# Altium PCB Digital_Clock_PCB.PcbDoc
Units mil, origin at the board's own origin, x right, y up, seen from the top; angles counter-clockwise.
Board outline 4350.74 x 2185.38 mil, 2 copper layers (Top Layer, Bottom Layer); 31 components, 24 nets, 126 pads, 0 vias.
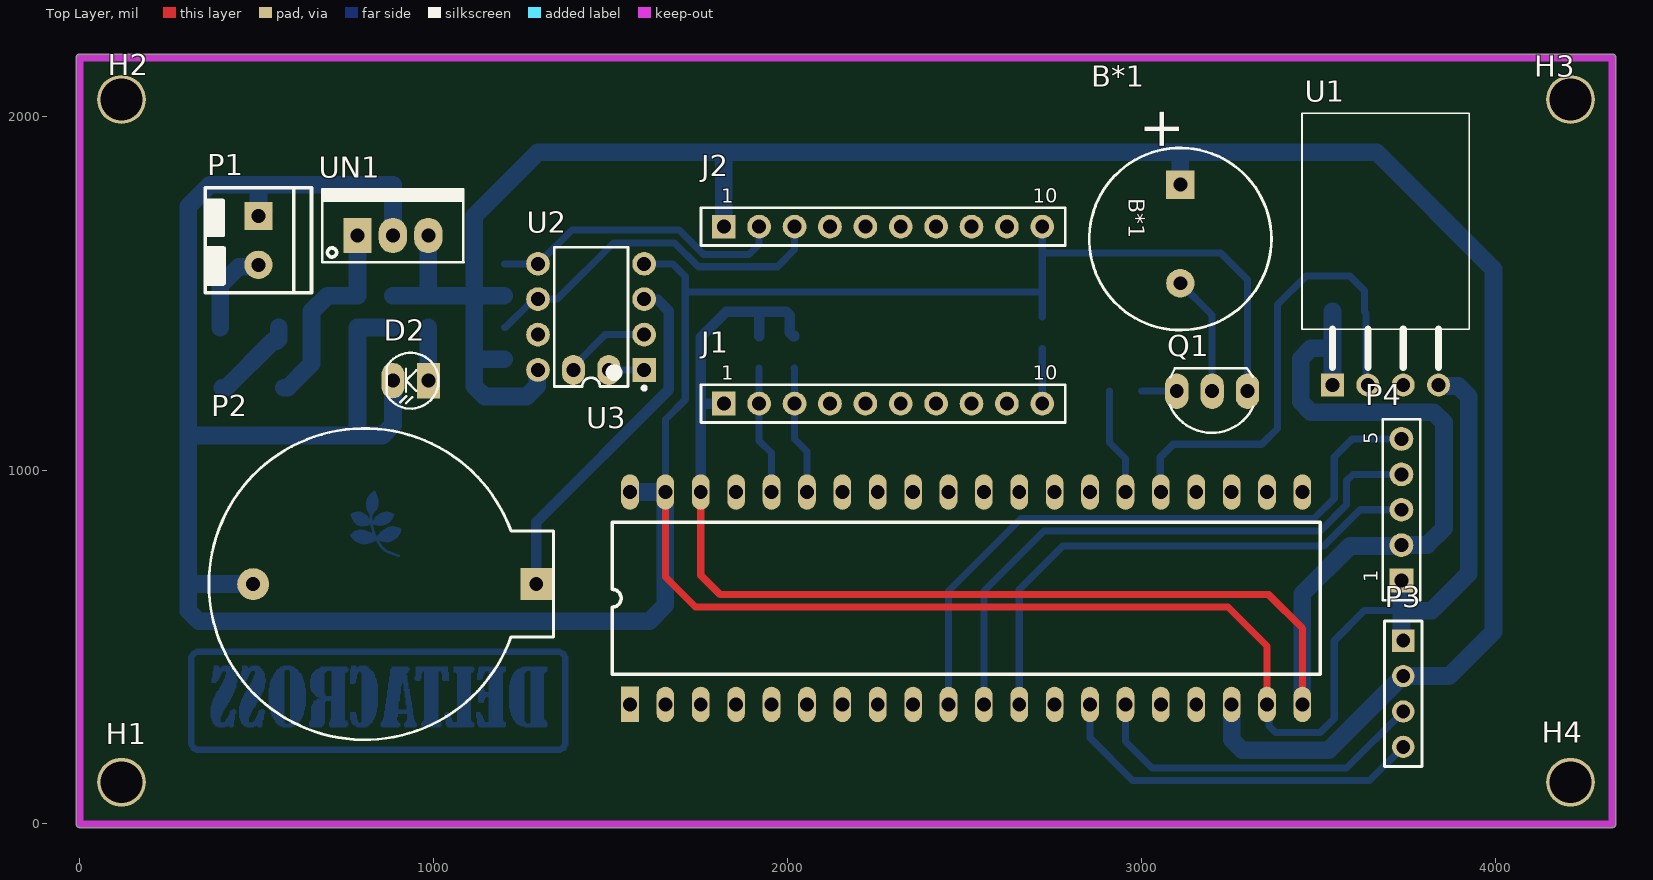
[diagram p0: Top Layer view]
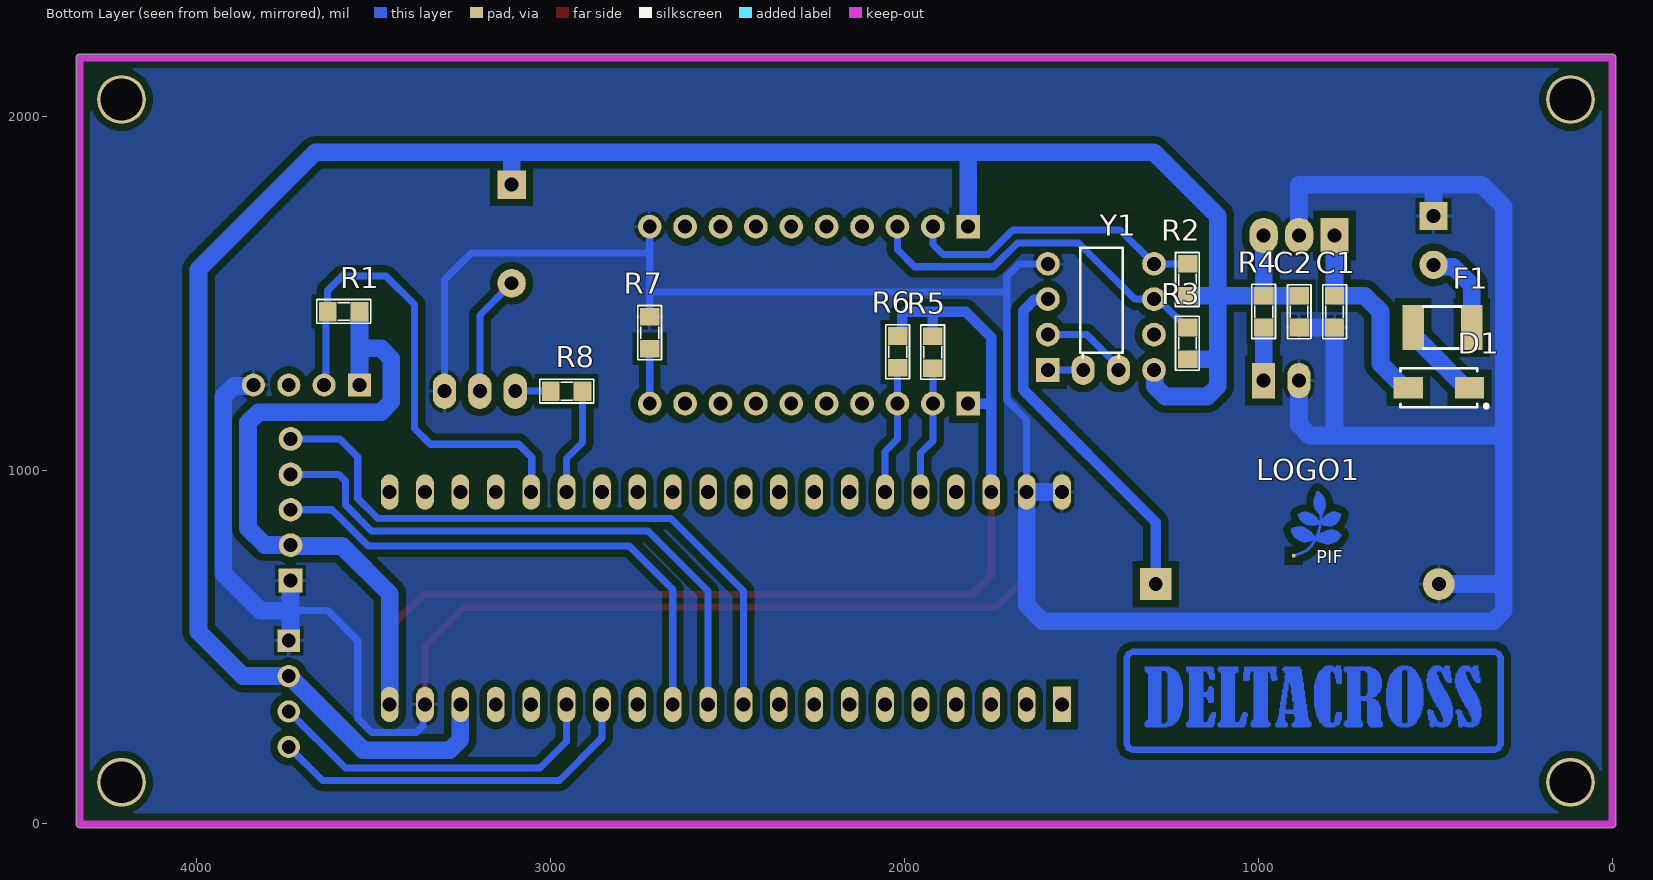
[diagram p1: Bottom Layer view, seen from below]
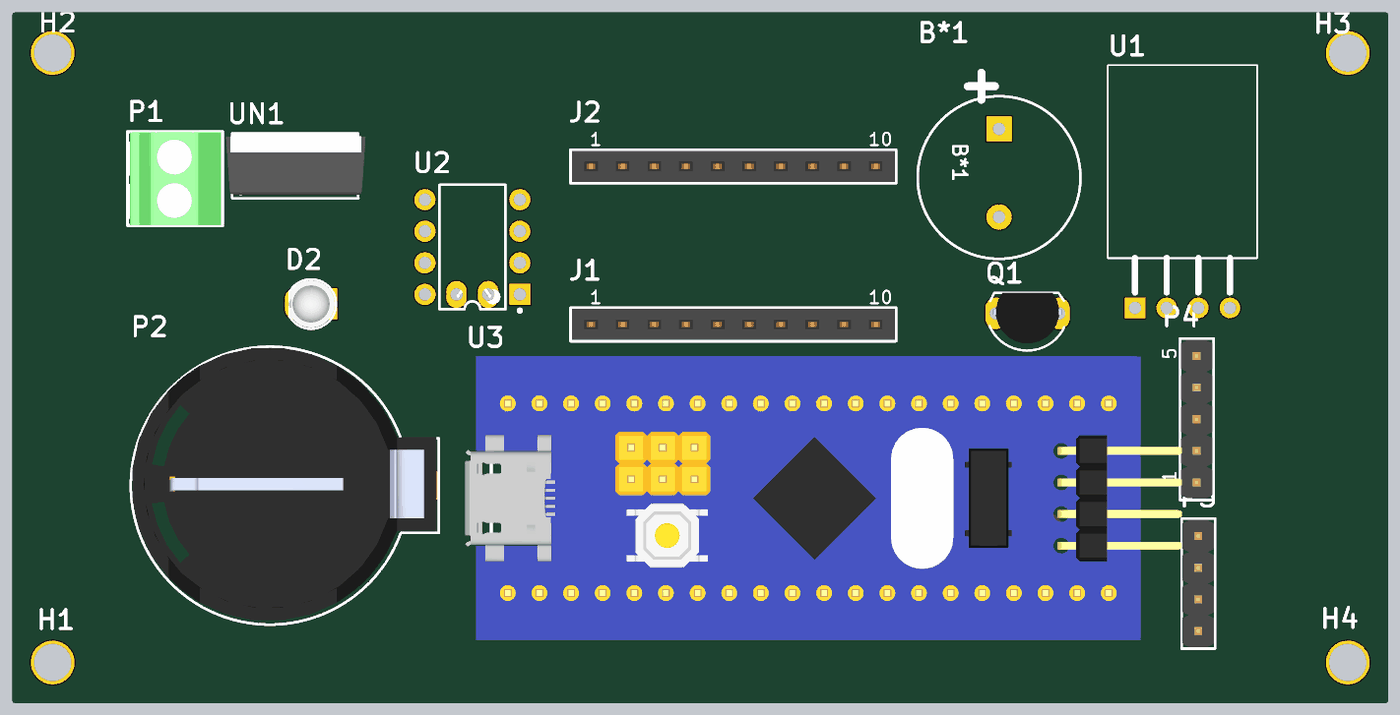
[diagram p2: 3D render of the assembled board from above, using the file's embedded part models]
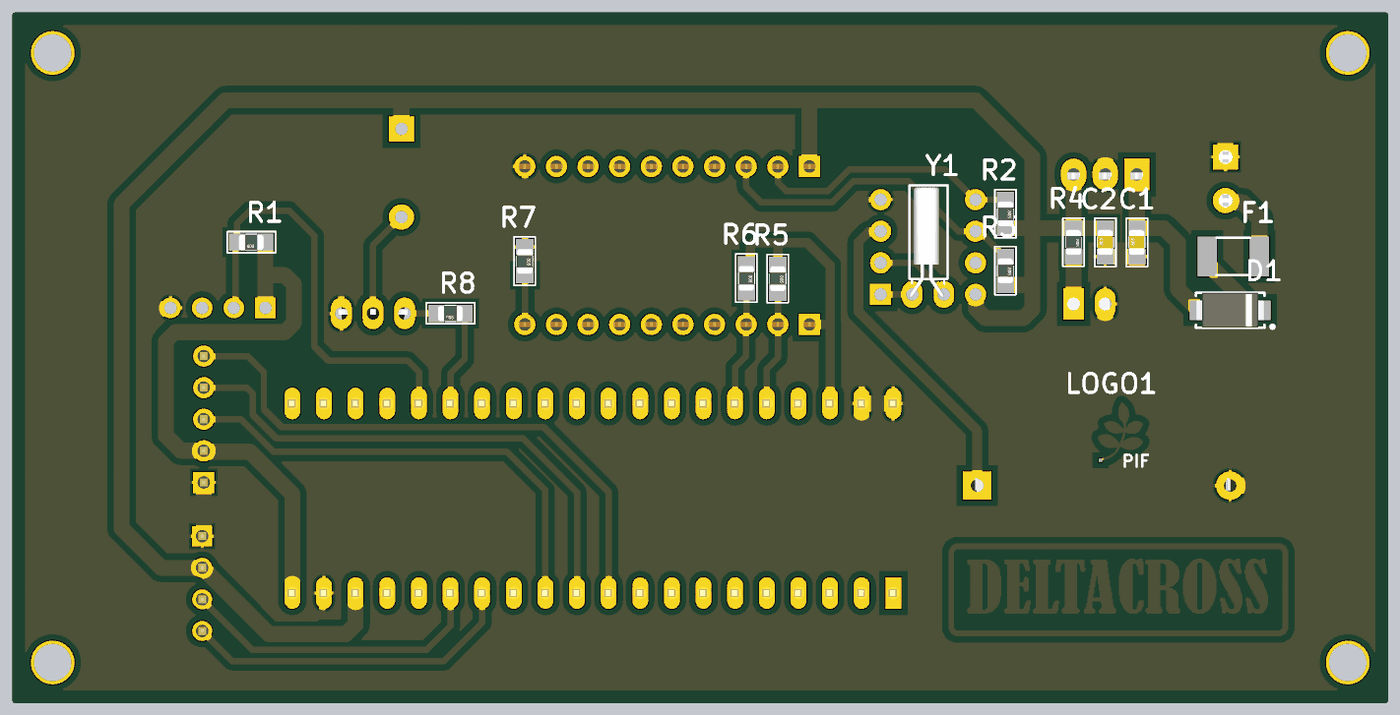
[diagram p3: 3D render of the assembled board from below, using the file's embedded part models]

## Layer stack, top to bottom
Top Solder: solder mask 0.4, Solder Resist, Dk 3.5
Top Layer: signal copper 1.4
Dielectric 1: dielectric 12.6, FR-4, Dk 4.8
Bottom Layer: signal copper 1.4
Bottom Solder: solder mask 0.4, Solder Resist, Dk 3.5

## Board outline
0,-10.02 cw(c0,0) -10.02,0 -10.02,2165.35 cw(c0,2165.35) 0,2175.37 4330.71,2175.37 cw(c4330.71,2165.35) 4340.72,2165.35 4340.72,0 cw(c4330.71,0) 4330.71,-10.02

## Design rules (kind name [scope] priority, off if disabled: settings)
Clearance [All] p1: gap=20 ignorepadtopadclearanceinfootprint=FALSE
PolygonConnect [All] p1: connectstyle=Relief reliefconductorwidth=10 reliefentries=4 polygonreliefangle="90 Angle" airgapwidth=10
RoutingVias [All] p1: holewidth=28 width=50 viastyle="Through Hole" minholewidth=28 minwidth=50 maxholewidth=28 maxwidth=50
SolderMaskExpansion [All] p1: expansion=4 istentingtop=FALSE
Width [All] p1: maxlimit=50 minlimit=20 preferedwidth=30
30 further rules are at their usual default settings.

## Classes and differential pairs
component class Digital_Clock_SCH: B*1 C1 C2 D1 D2 F1 H1 H2 H3 H4 J1 J2 LOGO1 P1 P2 P3 P4 Q1 R1 R2 R3 R4 R7 R8 U1 U2 U3 UN1 Y1

## Components (designator, comment, footprint, x,y, rotation, side; value= is the part's Value field where it differs from the comment)
B*1 "Buzzer" BUZZER 3110,1728 r270 top
C1 "Cap Non-Pol SMD" CAP-SM-0805 785,1403 r90 bottom value=0.33uF
C2 "Cap Non-Pol SMD" CAP-SM-0805 885,1403 r90 bottom value=0.1uF
D1 "D Schottky" SS34 490,1233 r0 bottom
D2 "LED" LED-3mm 985,1253 r180 top
F1 "Fuse" "FUSE SMD" 480,1403 r0 bottom
H1 "Hole" "LO KHOAN 3MM"#1 137,122 r0 top
H2 "Hole" "LO KHOAN 3MM"#2 142,2013 r0 top
H3 "Hole" "LO KHOAN 3MM"#3 4173,2009 r0 top
H4 "Hole" "LO KHOAN 3MM"#4 4195,126 r0 top
J1 "61301011821" 61301011821 2270,1188 r0 top locked
J2 "61301011821" 61301011821 2270,1688 r0 top locked
LOGO1 "LOGO PIF" "PIF LOGO SMALL TOP" 710,947 r180 bottom
P1 "Domino 2" "DOMINO SMALL 2" 555,1718 r270 top
P2 "VBAT" "VBAT CR2030" 890,678 r0 top
P3 "61300411121" 61300411121 3740,368 r270 top
P4 "61300511121" 61300511121 3735,888 r90 top
Q1 "C1815" QTO-92 3200,1223 r180 top
R1 "RESISTOR SMD" RES-SM-0805 3540,1448 r0 bottom value=4K7
R2 "RESISTOR SMD" RES-SM-0805 1200,1583 r270 bottom value=10K
R3 "RESISTOR SMD" RES-SM-0805 1200,1403 r270 bottom value=10K
R4 "RESISTOR SMD" RES-SM-0805 985,1493 r270 bottom value=1K
R5 "RESISTOR SMD" RES-SM-0805 1920,1378 r270 bottom value=10k
R6 "RESISTOR SMD" RES-SM-0805 2019,1379 r270 bottom value=10k
R7 "RESISTOR SMD" RES-SM-0805 2720,1433 r270 bottom value=10k
R8 "RESISTOR SMD" RES-SM-0805 2910,1223 r0 bottom value=22K
U1 "DHT11" SNR4-2.54-15.5X12.0X5.5MM 3690,1703 r90 top
U2 "DS1307+" MAXM-P8-1 1445,1433 r180 top
U3 "BLUEPILL" BLUEPILL 2510,658 r90 top
UN1 "LM7805" QTO-220 785,1663 r0 top
Y1 "32.768kHz" "XTAL 32768 3x8" 1395,1283 r90 bottom

## Footprints (in the part's own frame and the unit in brackets; to place one, negate y for a bottom-side part, rotate by r counter-clockwise, add the part's x,y. Pads: shape width x height; smd on the part's side, far side on the other; paste and mask are expansions set on the pad)
61300411121 [mm] "Pin Header, pitch 2.54 mm, THT, Vertical, single row, 4p"
  rect 1.6x1.6 hole 1: 1(-3.81,0)
  round 1.6 hole 1: 2(-1.27,0) 3(1.27,0) 4(3.81,0)
  silkscreen extent -5.23,-1.35 5.23,1.35, body extent -5.08,-1.27 5.08,1.27, height 8.57
61300511121 [mm] "Pin Header, pitch 2.54 mm, THT, Vertical, single row, 5p"
  rect 1.7x1.7 hole 1: 1(-5.08,0)
  round 1.7 hole 1: 2(-2.54,0) 3(0,0) 4(2.54,0) 5(5.08,0)
  silkscreen extent -6.5,-1.35 6.5,1.35, body extent -6.35,-1.27 6.35,1.27, height 8.57
61301011821 [mm] "Socket Header, Pitch 2.54 mm, THT, Vertical, single row, 10p"
  rect 1.7x1.7 hole 1: 1(-11.43,0)
  round 1.7 hole 1: 2(-8.89,0) 3(-6.35,0) 4(-3.81,0) 5(-1.27,0) 6(1.27,0) 7(3.81,0) 8(6.35,0) 9(8.89,0) 10(11.43,0)
  silkscreen extent -13.08,-1.35 13.08,1.35, body extent -12.95,-1.25 12.95,1.25, height 8.55
BLUEPILL [mil] "Development board STM32F103C8T6"
  rect 100x50 hole 39.37: 1(-320,955)
  oval 100x50 hole 39.37: 2(-320,855) 3(-320,755) 4(-320,655) 5(-320,555) 6(-320,455) 7(-320,355) 8(-320,255) 9(-320,155) 10(-320,55) 11(-320,-45) 12(-320,-145) 13(-320,-245) 14(-320,-345) 15(-320,-445) 16(-320,-545) 17(-320,-645) 18(-320,-745) 19(-320,-845) 20(-320,-945) 21(280,-945) 22(280,-845) 23(280,-745) 24(280,-645) 25(280,-545) 26(280,-445) 27(280,-345) 28(280,-245) 29(280,-145) 30(280,-45) 31(280,55) 32(280,155) 33(280,255) 34(280,355) 35(280,455) 36(280,555) 37(280,655) 38(280,755) 39(280,855) 40(280,955)
  silkscreen extent -235,-995 195,1005, body extent -470,-1178 430,1088, height 485
BUZZER [mil]
  rect 80x80 hole 39.37: 1(-78.73,0)
  round 80 hole 39.37: 2(200,0)
  silkscreen extent -182,-257 332,257
CAP-SM-0805 [mil]
  rect 50x55 smd: 1(0,0) 2(90,0)
  silkscreen extent -32,-34 121,33, body extent 6,-25 84,25, height 31
"DOMINO SMALL 2" [mil] "3.5 mm"
  rect 80x80 hole 39.37: 1(0,-50)
  round 80 hole 39.37: 2(137.8,-50)
  silkscreen extent -80,-203 217,100, body extent -79,-192 217,95, height 335
"FUSE SMD" [mm] "SMD FUSE"
  rect 1.55x3.21 smd: 1(-2.1,0) 2(2.1,0)
  silkscreen extent -1.35,-1.5 1.35,1.51, body extent -2.37,-1.71 2.36,1.71, height 0.75
LED-3mm [mil] "LED 2 PIN, 3ly Only colour"
  rect 65x100 hole 39.37: 1(0,0)
  oval 65x100 hole 39.37: 2(100,0)
  silkscreen extent -29,-78 118,79, body extent -25,-75 113,75, height 217
"LO KHOAN 3MM"#1 [mil]
  round 138 hole 118.1: 1(-18.89,-3.89)
"LO KHOAN 3MM"#2 [mil]
  round 138 hole 118.1: 1(-23.89,34.24)
"LO KHOAN 3MM"#3 [mil]
  round 138 hole 118.1: 1(39.6,38.24)
"LO KHOAN 3MM"#4 [mil]
  round 138 hole 118.1: 1(17.6,-7.89)
MAXM-P8-1 [mm] "DIP, 8-Leads, Body 9.375x6.985mm, Pitch 2.54mm"
  rect 1.7x1.7 hole 1: 1(-3.81,3.81)
  round 1.7 hole 1: 2(-3.81,1.27) 3(-3.81,-1.27) 4(-3.81,-3.81) 5(3.81,-3.81) 6(3.81,-1.27) 7(3.81,1.27) 8(3.81,3.81)
  silkscreen extent -3.94,-5 2.65,5.23, body extent -3.95,-4.95 3.95,4.95, height 4.58
"PIF LOGO SMALL TOP" [mil]
  rect 10x10 smd: 1(-190,-189)
  Top Layer region: -76.29,-64.08 -76.23,-64.06 -71.49,-64.7 -71.45,-64.72 -71.4,-64.72 -66.34,-66.32 -66.33,-66.32 -66.33,-66.32 -61.56,-67.89 -61.49,-67.95 -61.4,-67.97 -55.7,-72.41 -55.64,-72.52 -55.55,-72.6 -55.54,-72.69 -55.5,-72.77 -55.53,-72.89 -55.52,-73.01 -57.42,-78.41 -57.44,-78.43 -57.44,-78.45 -60.94,-86.68 -60.96,-86.71 -60.97,-86.75 -62.87,-89.91 -62.87,-89.91 -62.87,-89.92 -65.41,-94.02 -65.46,-94.06 -65.49,-94.12 -72.46,-100.79 -72.53,-100.82 -72.58,-100.88 -78.58,-104.05 -78.63,-104.05 -78.66,-104.08 -82.46,-105.35 -82.55,-105.34 -82.63,-105.37 -93.4,-105.37 -93.43,-105.36 -93.46,-105.37 -98.86,-104.74 -98.87,-104.73 -98.88,-104.74 -103.31,-104.1 -103.37,-104.07 -103.44,-104.07 -107.24,-102.47 -107.26,-102.44 -107.29,-102.44 -110.76,-100.54 -110.81,-100.48 -110.88,-100.45 -110.93,-100.32 -111.02,-100.22 -111.01,-100.14 -111.04,-100.07 -111.04,-93.43 -111,-93.33 -111,-93.22 -106.56,-83.08 -106.53,-83.05 -106.52,-83.01 -100.82,-74.14 -100.75,-74.09 -100.71,-74.02 -97.24,-71.15 -97.21,-71.14 -97.19,-71.11 -92.76,-68.28 -92.7,-68.27 -92.66,-68.23 -84.43,-65.06 -84.37,-65.06 -84.33,-65.03 -78.93,-64.07 -78.75,-64.11 -78.56,-64.13 -78.55,-64.15 -78.52,-64.16 -78.44,-64.28 -76.36,-64.06
  Top Layer region: -76.29,-64.08 -76.23,-64.06 -71.49,-64.7 -71.45,-64.72 -71.4,-64.72 -66.34,-66.32 -66.33,-66.32 -66.33,-66.32 -61.56,-67.89 -61.49,-67.95 -61.4,-67.97 -55.7,-72.41 -55.64,-72.52 -55.55,-72.6 -55.54,-72.69 -55.5,-72.77 -55.53,-72.89 -55.52,-73.01 -57.42,-78.41 -57.44,-78.43 -57.44,-78.45 -60.94,-86.68 -60.96,-86.71 -60.97,-86.75 -62.87,-89.91 -62.87,-89.91 -62.87,-89.92 -65.41,-94.02 -65.46,-94.06 -65.49,-94.12 -72.46,-100.79 -72.53,-100.82 -72.58,-100.88 -78.58,-104.05 -78.63,-104.05 -78.66,-104.08 -82.46,-105.35 -82.55,-105.34 -82.63,-105.37 -93.4,-105.37 -93.43,-105.36 -93.46,-105.37 -98.86,-104.74 -98.87,-104.73 -98.88,-104.74 -103.31,-104.1 -103.37,-104.07 -103.44,-104.07 -107.24,-102.47 -107.26,-102.44 -107.29,-102.44 -110.76,-100.54 -110.81,-100.48 -110.88,-100.45 -110.93,-100.32 -111.02,-100.22 -111.01,-100.14 -111.04,-100.07 -111.04,-93.43 -111,-93.33 -111,-93.22 -106.56,-83.08 -106.53,-83.05 -106.52,-83.01 -100.82,-74.14 -100.75,-74.09 -100.71,-74.02 -97.24,-71.15 -97.21,-71.14 -97.19,-71.11 -92.76,-68.28 -92.7,-68.27 -92.66,-68.23 -84.43,-65.06 -84.37,-65.06 -84.33,-65.03 -78.93,-64.07 -78.75,-64.11 -78.56,-64.13 -78.55,-64.15 -78.52,-64.16 -78.44,-64.28 -76.36,-64.06
  Top Layer region: -123.07,-4.91 -122.89,-4.93 -122.87,-4.96 -122.84,-4.97 -118.74,-8.14 -118.72,-8.16 -118.7,-8.17 -115.22,-11.32 -112.06,-13.84 -112.04,-13.89 -111.99,-13.91 -107.89,-18.65 -107.88,-18.68 -107.85,-18.69 -104.35,-23.76 -104.34,-23.83 -104.29,-23.87 -101.76,-30.54 -101.76,-30.57 -101.74,-30.6 -99.54,-39.13 -99.55,-39.19 -99.53,-39.25 -99.19,-47.81 -99.22,-47.88 -99.2,-47.95 -101.11,-56.48 -101.14,-56.53 -101.14,-56.58 -104,-63.25 -104.02,-63.26 -104.02,-63.29 -107.19,-69.29 -107.2,-69.3 -107.2,-69.31 -110.03,-74.08 -110.08,-74.11 -110.1,-74.16 -112.97,-77.33 -112.98,-77.34 -112.98,-77.35 -113.01,-77.36 -113.02,-77.38 -113.18,-77.43 -113.34,-77.51 -113.35,-77.5 -113.37,-77.51 -113.39,-77.5 -113.41,-77.51 -113.57,-77.43 -113.73,-77.37 -113.74,-77.35 -113.75,-77.35 -113.76,-77.33 -113.78,-77.31 -125.48,-63.38 -125.48,-63.38 -125.48,-63.38 -128.65,-59.58 -128.67,-59.51 -128.73,-59.45 -130.96,-54.39 -130.96,-54.34 -130.99,-54.3 -132.89,-47 -132.88,-46.96 -132.91,-46.92 -133.54,-40.28 -133.52,-40.23 -133.54,-40.18 -132.57,-29.42 -132.56,-29.4 -132.57,-29.37 -131.3,-22.07 -131.28,-22.04 -131.28,-22 -129.38,-16.3 -129.35,-16.27 -129.35,-16.23 -127.16,-11.8 -125.89,-8.98 -125.87,-8.96 -125.87,-8.93 -123.63,-5.13 -123.6,-5.1 -123.6,-5.07 -123.44,-4.98 -123.3,-4.88 -123.27,-4.88 -123.24,-4.86
  Top Layer region: -155.42,-64.71 -155.38,-64.7 -149.38,-65.67 -149.35,-65.68 -149.32,-65.68 -143.92,-67.25 -143.88,-67.28 -143.82,-67.28 -138.12,-70.15 -138.1,-70.17 -138.08,-70.18 -131.98,-74.08 -131.96,-74.1 -131.94,-74.1 -129.07,-76.3 -129.04,-76.36 -128.98,-76.4 -127.74,-77.95 -125.89,-79.48 -125.85,-79.55 -125.79,-79.59 -124.24,-81.8 -122.36,-83.98 -122.34,-84.02 -122.31,-84.04 -120.72,-86.57 -118.52,-89.72 -118.52,-89.74 -118.5,-89.75 -116.6,-92.92 -116.58,-93.07 -116.53,-93.2 -116.54,-93.23 -116.53,-93.26 -117.16,-98.96 -117.18,-98.99 -117.17,-99.02 -117.28,-99.17 -117.36,-99.32 -117.4,-99.33 -117.42,-99.36 -118.98,-100.33 -119.1,-100.35 -119.19,-100.4 -121.39,-100.7 -126.71,-102.29 -126.73,-102.28 -126.75,-102.29 -130.88,-103.23 -130.89,-103.23 -130.89,-103.23 -135.62,-104.2 -135.68,-104.19 -135.73,-104.21 -139.53,-104.21 -139.55,-104.2 -139.58,-104.21 -148.88,-103.47 -148.95,-103.44 -149.02,-103.44 -154.09,-101.54 -154.11,-101.52 -154.14,-101.52 -161.74,-97.72 -161.79,-97.66 -161.86,-97.64 -167.56,-92.57 -167.58,-92.52 -167.63,-92.5 -172.06,-86.8 -172.07,-86.77 -172.09,-86.76 -174.92,-82.32 -174.93,-82.28 -174.97,-82.24 -177.2,-76.84 -177.2,-76.8 -177.22,-76.77 -178.49,-72.04 -178.47,-71.89 -178.48,-71.73 -178.44,-71.69 -178.44,-71.63 -178.37,-71.58 -178.38,-71.49 -178.36,-71.47 -178.36,-71.45 -178.23,-71.32 -178.11,-71.18 -174.94,-69.61 -172.81,-68.55 -172.8,-68.55 -172.79,-68.54 -168.06,-66.34 -168.01,-66.34 -167.97,-66.31 -161.63,-64.71 -161.56,-64.72 -161.5,-64.69 -155.47,-64.69
  Top Layer region: -170.52,-106.31 -170.47,-106.3 -163.83,-107.57 -163.79,-107.6 -163.74,-107.59 -157.07,-110.13 -157.04,-110.16 -156.99,-110.17 -151.3,-113.63 -147.84,-115.53 -147.82,-115.55 -147.79,-115.56 -144.62,-117.79 -144.6,-117.82 -144.57,-117.83 -141.41,-120.66 -141.39,-120.7 -141.35,-120.72 -135.32,-128.02 -135.31,-128.04 -135.29,-128.05 -129.59,-135.95 -129.57,-136.04 -129.51,-136.12 -129.52,-136.19 -129.49,-136.27 -129.51,-136.31 -129.5,-136.35 -129.55,-136.43 -129.56,-136.53 -132.97,-142.69 -132.67,-144.41 -132.7,-144.55 -132.69,-144.69 -132.74,-144.74 -132.76,-144.81 -132.88,-144.89 -132.97,-144.99 -140.57,-148.49 -140.66,-148.49 -140.73,-148.54 -155,-150.44 -155.03,-150.43 -155.07,-150.44 -161.7,-150.44 -161.75,-150.42 -161.8,-150.43 -166.87,-149.46 -166.9,-149.44 -166.94,-149.44 -173.28,-147.24 -173.32,-147.21 -173.37,-147.2 -177.8,-144.67 -177.82,-144.65 -177.84,-144.64 -184.18,-140.21 -184.19,-140.18 -184.23,-140.17 -187.09,-137.64 -187.11,-137.6 -187.15,-137.57 -189.99,-134.07 -189.99,-134.05 -190.02,-134.03 -192.55,-130.23 -192.55,-130.21 -192.57,-130.2 -195.1,-125.77 -195.11,-125.74 -195.12,-125.73 -197.02,-121.63 -197.03,-121.58 -197.05,-121.55 -198.95,-114.88 -198.94,-114.78 -198.97,-114.68 -198.92,-114.58 -198.91,-114.47 -198.82,-114.4 -198.77,-114.31 -193.71,-110.21 -193.63,-110.19 -193.57,-110.13 -188.83,-108.23 -188.81,-108.23 -188.8,-108.22 -183.73,-106.62 -183.65,-106.62 -183.57,-106.59 -183.24,-106.59 -176.62,-106.29 -176.61,-106.3 -176.6,-106.29 -170.57,-106.29
  Top Layer region: -82.86,-115.8 -82.83,-115.79 -78.4,-116.09 -78.37,-116.11 -78.34,-116.1 -74.54,-116.73 -74.51,-116.76 -74.46,-116.75 -70.66,-118.02 -70.64,-118.04 -70.62,-118.04 -68.39,-119 -65.23,-120.26 -65.18,-120.32 -65.1,-120.34 -61,-123.51 -60.99,-123.53 -60.96,-123.54 -54.93,-129.24 -54.88,-129.35 -54.79,-129.45 -54.8,-129.54 -54.76,-129.62 -54.8,-129.73 -54.81,-129.86 -56.41,-133.33 -56.42,-133.34 -56.43,-133.36 -57.99,-136.23 -58.03,-136.26 -58.04,-136.3 -60.58,-139.47 -60.59,-139.48 -60.6,-139.49 -63.12,-142.32 -65.98,-145.81 -66.14,-145.9 -66.3,-146 -67.3,-146.19 -68.55,-147.42 -68.62,-147.45 -68.66,-147.5 -74.02,-150.67 -74.06,-150.67 -74.08,-150.7 -79.15,-152.93 -79.16,-152.93 -79.17,-152.94 -83.93,-154.84 -83.99,-154.84 -84.03,-154.86 -88.76,-155.8 -88.81,-155.79 -88.85,-155.81 -97.71,-156.14 -97.75,-156.13 -97.79,-156.14 -104.12,-155.51 -104.17,-155.48 -104.22,-155.49 -110.56,-153.59 -110.57,-153.58 -110.58,-153.58 -116.91,-151.34 -116.94,-151.32 -116.98,-151.32 -127.11,-146.25 -127.17,-146.18 -127.25,-146.15 -127.29,-146.05 -127.37,-145.97 -127.37,-145.95 -127.38,-145.94 -127.37,-145.85 -127.41,-145.77 -127.37,-145.67 -127.37,-145.56 -123.57,-136.39 -123.49,-136.32 -123.45,-136.22 -120.81,-133.55 -121.07,-131.92 -121.06,-131.9 -121.07,-131.88 -121.02,-131.7 -120.97,-131.51 -120.95,-131.51 -120.95,-131.49 -118.98,-129.13 -119,-129.14 -119.19,-129.16 -119.38,-129.2 -119.39,-129.19 -119.41,-129.19 -119.56,-129.07 -119.72,-128.96 -119.72,-128.94 -119.74,-128.94 -119.76,-128.74 -119.8,-128.55 -119.79,-128.54 -119.79,-128.52 -119.67,-128.37 -119.56,-128.21 -114.19,-124.75 -114.02,-124.71 -113.85,-124.66 -113.82,-124.68 -113.79,-124.67 -113.64,-124.77 -113.63,-124.78 -110.38,-122.84 -110.35,-122.83 -110.33,-122.81 -105.56,-120.58 -105.55,-120.58 -105.54,-120.57 -100.17,-118.37 -100.15,-118.37 -100.14,-118.35 -96.34,-117.09 -96.29,-117.09 -96.25,-117.07 -90.22,-116.1 -90.19,-116.11 -90.16,-116.09 -82.89,-115.79
  Top Layer region: -82.86,-115.8 -82.83,-115.79 -78.4,-116.09 -78.37,-116.11 -78.34,-116.1 -74.54,-116.73 -74.51,-116.76 -74.46,-116.75 -70.66,-118.02 -70.64,-118.04 -70.62,-118.04 -68.39,-119 -65.23,-120.26 -65.18,-120.32 -65.1,-120.34 -61,-123.51 -60.99,-123.53 -60.96,-123.54 -54.93,-129.24 -54.88,-129.35 -54.79,-129.45 -54.8,-129.54 -54.76,-129.62 -54.8,-129.73 -54.81,-129.86 -56.41,-133.33 -56.42,-133.34 -56.43,-133.36 -57.99,-136.23 -58.03,-136.26 -58.04,-136.3 -60.58,-139.47 -60.59,-139.48 -60.6,-139.49 -63.12,-142.32 -65.98,-145.81 -66.14,-145.9 -66.3,-146 -67.3,-146.19 -68.55,-147.42 -68.62,-147.45 -68.66,-147.5 -74.02,-150.67 -74.06,-150.67 -74.08,-150.7 -79.15,-152.93 -79.16,-152.93 -79.17,-152.94 -83.93,-154.84 -83.99,-154.84 -84.03,-154.86 -88.76,-155.8 -88.81,-155.79 -88.85,-155.81 -97.71,-156.14 -97.75,-156.13 -97.79,-156.14 -104.12,-155.51 -104.17,-155.48 -104.22,-155.49 -110.56,-153.59 -110.57,-153.58 -110.58,-153.58 -116.91,-151.34 -116.94,-151.32 -116.98,-151.32 -127.11,-146.25 -127.17,-146.18 -127.25,-146.15 -127.29,-146.05 -127.37,-145.97 -127.37,-145.95 -127.38,-145.94 -127.37,-145.85 -127.41,-145.77 -127.37,-145.67 -127.37,-145.56 -123.57,-136.39 -123.49,-136.32 -123.45,-136.22 -120.81,-133.55 -121.07,-131.92 -121.06,-131.9 -121.07,-131.88 -121.02,-131.7 -120.97,-131.51 -120.95,-131.51 -120.95,-131.49 -118.98,-129.13 -119,-129.14 -119.19,-129.16 -119.38,-129.2 -119.39,-129.19 -119.41,-129.19 -119.56,-129.07 -119.72,-128.96 -119.72,-128.94 -119.74,-128.94 -119.76,-128.74 -119.8,-128.55 -119.79,-128.54 -119.79,-128.52 -119.67,-128.37 -119.56,-128.21 -114.19,-124.75 -114.02,-124.71 -113.85,-124.66 -113.82,-124.68 -113.79,-124.67 -113.64,-124.77 -113.63,-124.78 -110.38,-122.84 -110.35,-122.83 -110.33,-122.81 -105.56,-120.58 -105.55,-120.58 -105.54,-120.57 -100.17,-118.37 -100.15,-118.37 -100.14,-118.35 -96.34,-117.09 -96.29,-117.09 -96.25,-117.07 -90.22,-116.1 -90.19,-116.11 -90.16,-116.09 -82.89,-115.79
  Top Layer region: -123.07,-4.91 -122.89,-4.93 -122.87,-4.96 -122.84,-4.97 -118.74,-8.14 -118.72,-8.16 -118.7,-8.17 -115.22,-11.32 -112.06,-13.84 -112.04,-13.89 -111.99,-13.91 -107.89,-18.65 -107.88,-18.68 -107.85,-18.69 -104.35,-23.76 -104.34,-23.83 -104.29,-23.87 -101.76,-30.54 -101.76,-30.57 -101.74,-30.6 -99.54,-39.13 -99.55,-39.19 -99.53,-39.25 -99.19,-47.81 -99.22,-47.88 -99.2,-47.95 -101.11,-56.48 -101.14,-56.53 -101.14,-56.58 -104,-63.25 -104.02,-63.26 -104.02,-63.29 -107.19,-69.29 -107.2,-69.3 -107.2,-69.31 -110.03,-74.08 -110.08,-74.11 -110.1,-74.16 -112.97,-77.33 -112.98,-77.34 -112.98,-77.35 -113.01,-77.36 -113.02,-77.38 -113.18,-77.43 -113.34,-77.51 -113.35,-77.5 -113.37,-77.51 -113.39,-77.5 -113.41,-77.51 -113.57,-77.43 -113.73,-77.37 -113.74,-77.35 -113.75,-77.35 -113.76,-77.33 -113.78,-77.31 -125.48,-63.38 -125.48,-63.38 -125.48,-63.38 -128.65,-59.58 -128.67,-59.51 -128.73,-59.45 -130.96,-54.39 -130.96,-54.34 -130.99,-54.3 -132.89,-47 -132.88,-46.96 -132.91,-46.92 -133.54,-40.28 -133.53,-40.26 -133.54,-40.23 -133.54,-31 -133.51,-30.94 -133.52,-30.87 -131.29,-22.03 -131.28,-22.02 -131.28,-22 -129.38,-16.3 -129.35,-16.27 -129.35,-16.23 -127.16,-11.8 -125.89,-8.98 -125.87,-8.96 -125.87,-8.93 -123.63,-5.13 -123.6,-5.1 -123.6,-5.07 -123.44,-4.98 -123.3,-4.88 -123.27,-4.88 -123.24,-4.86
  Top Layer region: -155.42,-64.71 -155.38,-64.7 -149.38,-65.67 -149.35,-65.68 -149.32,-65.68 -143.92,-67.25 -143.88,-67.28 -143.82,-67.28 -138.12,-70.15 -138.1,-70.17 -138.08,-70.18 -131.98,-74.08 -131.96,-74.1 -131.94,-74.1 -129.07,-76.3 -129.04,-76.36 -128.98,-76.4 -127.74,-77.95 -125.89,-79.48 -125.85,-79.55 -125.79,-79.59 -124.24,-81.8 -122.36,-83.98 -122.34,-84.02 -122.31,-84.04 -120.72,-86.57 -118.52,-89.72 -118.52,-89.74 -118.5,-89.75 -116.6,-92.92 -116.58,-93.07 -116.53,-93.2 -116.54,-93.23 -116.53,-93.26 -117.16,-98.96 -117.18,-98.99 -117.17,-99.02 -117.28,-99.17 -117.36,-99.32 -117.4,-99.33 -117.42,-99.36 -118.98,-100.33 -119.1,-100.35 -119.19,-100.4 -121.39,-100.7 -126.71,-102.29 -126.73,-102.28 -126.75,-102.29 -130.88,-103.23 -130.89,-103.23 -130.89,-103.23 -135.62,-104.2 -135.68,-104.19 -135.73,-104.21 -139.53,-104.21 -139.55,-104.2 -139.58,-104.21 -148.88,-103.47 -148.95,-103.44 -149.02,-103.44 -154.09,-101.54 -154.11,-101.52 -154.14,-101.52 -161.74,-97.72 -161.79,-97.66 -161.86,-97.64 -167.56,-92.57 -167.58,-92.52 -167.63,-92.5 -172.06,-86.8 -172.07,-86.77 -172.09,-86.76 -174.92,-82.32 -174.93,-82.28 -174.97,-82.24 -177.2,-76.84 -177.2,-76.8 -177.22,-76.77 -178.49,-72.04 -178.47,-71.89 -178.48,-71.73 -178.44,-71.69 -178.44,-71.63 -178.37,-71.58 -178.38,-71.49 -178.36,-71.47 -178.36,-71.45 -178.23,-71.32 -178.11,-71.18 -174.94,-69.61 -172.81,-68.55 -172.8,-68.55 -172.79,-68.54 -168.06,-66.34 -168.01,-66.34 -167.97,-66.31 -161.63,-64.71 -161.56,-64.72 -161.5,-64.69 -155.47,-64.69
  Top Layer region: -170.52,-106.31 -170.47,-106.3 -163.83,-107.57 -163.79,-107.6 -163.74,-107.59 -157.07,-110.13 -157.04,-110.16 -156.99,-110.17 -151.3,-113.63 -147.84,-115.53 -147.82,-115.55 -147.79,-115.56 -144.62,-117.79 -144.6,-117.82 -144.57,-117.83 -141.41,-120.66 -141.39,-120.7 -141.35,-120.72 -135.32,-128.02 -135.31,-128.04 -135.29,-128.05 -129.59,-135.95 -129.57,-136.04 -129.51,-136.12 -129.52,-136.19 -129.49,-136.27 -129.51,-136.31 -129.5,-136.35 -129.55,-136.43 -129.56,-136.53 -132.97,-142.69 -132.67,-144.41 -132.7,-144.55 -132.69,-144.69 -132.74,-144.74 -132.76,-144.81 -132.88,-144.89 -132.97,-144.99 -140.57,-148.49 -140.66,-148.49 -140.73,-148.54 -155,-150.44 -155.03,-150.43 -155.07,-150.44 -161.7,-150.44 -161.75,-150.42 -161.8,-150.43 -166.87,-149.46 -166.9,-149.44 -166.94,-149.44 -173.28,-147.24 -173.32,-147.21 -173.37,-147.2 -177.8,-144.67 -177.82,-144.65 -177.84,-144.64 -184.18,-140.21 -184.19,-140.18 -184.23,-140.17 -187.09,-137.64 -187.11,-137.6 -187.15,-137.57 -189.99,-134.07 -189.99,-134.05 -190.02,-134.03 -192.55,-130.23 -192.55,-130.21 -192.57,-130.2 -195.1,-125.77 -195.11,-125.74 -195.12,-125.73 -197.02,-121.63 -197.03,-121.58 -197.05,-121.55 -198.95,-114.88 -198.94,-114.78 -198.97,-114.68 -198.92,-114.58 -198.91,-114.47 -198.82,-114.4 -198.77,-114.31 -193.71,-110.21 -193.63,-110.19 -193.57,-110.13 -188.83,-108.23 -188.81,-108.23 -188.8,-108.22 -183.73,-106.62 -183.65,-106.62 -183.57,-106.59 -183.24,-106.59 -176.62,-106.29 -176.61,-106.3 -176.6,-106.29 -170.57,-106.29
  Top Layer lines w7.87: -112.9,-82.47 -113.17,-75.53 ; -112.9,-82.47 -113.43,-88.33 ; -112.9,-82.47 -113.17,-75.53 ; -112.9,-82.47 -113.43,-88.33 ; -113.17,-75.53 -113.7,-72.07 -113.17,-75.53 ; -113.43,-88.33 -113.97,-94.73 ; -113.43,-88.33 -113.97,-94.73 ; -113.97,-94.73 -115.3,-104.07 ; -113.97,-94.73 -115.3,-104.07 ; -115.3,-104.07 -116.37,-109.67 ; -115.3,-104.07 -116.37,-109.67 ; -116.37,-109.67 -119.27,-119.83 ; -116.37,-109.67 -119.27,-119.83 ; -119.27,-119.83 -120.07,-122.5 ; -119.27,-119.83 -120.07,-122.5 ; -120.07,-122.5 -124.07,-132.1 ; -120.07,-122.5 -124.07,-132.1 ; -124.07,-132.1 -128.07,-139.57 ; -124.07,-132.1 -128.07,-139.57 ; -128.07,-139.57 -134.73,-152.1 ; -128.07,-139.57 -134.73,-152.1 ; -134.73,-152.1 -137.67,-157.17 ; -134.73,-152.1 -137.67,-157.17 ; -137.67,-157.17 -140.33,-161.17 ; -137.67,-157.17 -140.33,-161.17 ; -140.33,-161.17 -144.07,-165.43 ; -140.33,-161.17 -144.07,-165.43 ; -144.07,-165.43 -146.97,-168.13 ; -144.07,-165.43 -146.97,-168.13 ; -146.97,-168.13 -153.03,-173.1 ; -146.97,-168.13 -153.03,-173.1 ; -153.03,-173.1 -160.73,-177.5 ; -153.03,-173.1 -160.73,-177.5 ; -160.73,-177.5 -164.57,-179.7 ; -160.73,-177.5 -164.57,-179.7 ; -164.57,-179.7 -169.53,-181.33 ; -164.57,-179.7 -169.53,-181.33 ; -169.53,-181.33 -190.97,-189.03 -169.53,-181.33
QTO-92 [mil] "TO-92"
  oval 66x100 hole 39.37: 1(-100,0) 2(0,0) 3(100,0)
  silkscreen extent -117,-65 120,118, body extent -109,-66 109,96, height 245
QTO-220 [mil] "TO-220 - 1-2-3"
  rect 80x100 hole 39.37: 1(0,0)
  oval 80x100 hole 39.37: 2(100,0) 3(200,0)
  silkscreen extent -100,-76 300,130, body extent -119,-64 322,121, height 755
RES-SM-0805 [mil]
  rect 50x55 smd: 1(0,0) 2(90,0)
  silkscreen extent -32,-34 121,33, body extent 6,-25 84,25, height 31
SNR4-2.54-15.5X12.0X5.5MM [mil]
  rect 65x65 hole 39.37: 1(-462.6,150)
  round 65 hole 39.37: 2(-462.6,50) 3(-462.6,-50) 4(-462.6,-150)
  silkscreen extent -413,-236 305,236
SS34 [mm] "DO-214-AC/SMA Molded Diode, Body 5.3x2.6mm, IPC Medium Density"
  rect 2.1x1.55 smd: 1(-2.2,0) 2(2.2,0)
  silkscreen extent -3.52,-1.4 2.75,1.45, body extent -2.75,-1.4 2.75,1.4, height 2.3
"VBAT CR2030" [mil]
  rect 90x90 hole 39.37: 1(400,0)
  round 90 hole 39.37: 2(-400,0)
  silkscreen extent -525,-440 449,440, body extent -523,-428 442,438, height 335
"XTAL 32768 3x8" [mil] "Crystal for 32,768kHz, 2pin"
  oval 85x65 hole 39.37: 1(0,0) 2(0,100)
  silkscreen extent 34,-12 345,109, body extent -11,-1 339,111, height 79

## Part data
C1 C2: "Capacitor"
D1: "Schottky Diode", Code_JEDEC=DO-214-AA, LatestRevisionDate=17-Jul-2002, LatestRevisionNote="Re-released for DXP Platform.", PackageDescription="DO-214-AA/SMB; 2 C-Bend Leads; Body 5.3 x 3.6 mm, inc. leads (LxW)", PackageReference=SMB, Published=8-Jun-2000, Publisher="Altium Limited"
H1 H2 H3 H4: "Hole 3mm"
J1 J2: "WR-PHD Socket Header, THT, pitch 2.54mm, Single Row, Vertical, 10p", Contact Resistance=20mOhm, Manufacturer="Wurth Elektronik", Operating Temperature="-40 to +125degC", Rated Current=3A, Withstanding Voltage=500VAC, Working Voltage=250VAC, ComponentLink1Description=Manufacturer, ComponentLink1URL=http://www.we-online.de, ComponentLink2Description=Datasheet, ComponentLink2URL=https://www.we-online.com/catalog/datasheet/61301011821.pdf, Gender="Socket Header", Manufacturer Part Number=61301011821, Mounting Technology=THT, Orientation=Vertical, Packaging=Tray, Pin Number=10, Pitch=2.54mm, Published Date="May 2020", Row Number=Single
P1: "Domino, 2-Pin", LatestRevisionDate=17-Jul-2002, LatestRevisionNote="Re-released for DXP Platform.", Publisher="Altium Limited"
P2: library part "VBAT CR2032", "CR2032", Manufacturer="DANTONA INDUSTRIES", Manufacturer Part Number="CR2032 SANYO", ComponentLink1Description=http://www.farnell.com/datasheets/1797668.pdf, ComponentLink1URL=http://www.farnell.com/datasheets/1797668.pdf, ComponentLink2Description=/datasheets/DANTONA/CRSANYO.pdf, ComponentLink2URL=/datasheets/DANTONA/CRSANYO.pdf, Pricing 1="1=0.768, 5=0.655, 10=0.615, 25=0.565, 50=0.51, 100=0.46, 250=0.41 (USD)", RoHS=NA, Stock 1=1694, Supplier 1=Newark
P3: "WR-PHD Pin Header, THT, pitch 2.54mm, Single Row, Vertical, 4p", Contact Resistance=20mOhm, Manufacturer="Wurth Elektronik", Operating Temperature="-40 to +105degC", Rated Current=3A, Withstanding Voltage=500VAC, Working Voltage=250VAC, ComponentLink1Description=Manufacturer, ComponentLink1URL=http://www.we-online.de, ComponentLink2Description=Datasheet, ComponentLink2URL=https://www.we-online.com/catalog/datasheet/61300411121.pdf, Gender="Pin Header", Manufacturer Part Number=61300411121, Mounting Technology=THT, Orientation=Vertical, Packaging=Bag, Pin Number=4, Pitch=2.54mm, Published Date="May 2020", Row Number=Single
P4: "WR-PHD Pin Header, THT, pitch 2.54mm, Single Row, Vertical, 5p", Contact Resistance=20mOhm, Manufacturer="Wurth Elektronik", Operating Temperature="-40 to +105degC", Rated Current=3A, Withstanding Voltage=500VAC, Working Voltage=250VAC, ComponentLink1Description=Manufacturer, ComponentLink1URL=http://www.we-online.de, ComponentLink2Description=Datasheet, ComponentLink2URL=https://www.we-online.com/catalog/datasheet/61300511121.pdf, Gender="Pin Header", Manufacturer Part Number=61300511121, Mounting Technology=THT, Orientation=Vertical, Packaging=Bag, Pin Number=5, Pitch=2.54mm, Published Date="May 2020", Row Number=Single
Q1: "NPN Bipolar Transistor"
R1 R2 R3 R4 R5 R6 R7 R8: "Resistor"
U1: library part TEM-HUM-DHT11(4P-15.5X12.0MM), "Servo AC 100 ~ 120VAC Supply 10A 120V Load", Package=None, Availability="In Stock", Check_prices=https://www.snapeda.com/parts/DHT11/Panasonic/view-part/6618018/?ref=eda, MF="Panasonic Industrial Automation Sales", MP=DHT11, Price=None, Purchase-URL=https://pricing.snapeda.com/search/part/DHT11/?ref=eda, SnapEDA_Link=https://www.snapeda.com/parts/DHT11/Panasonic/view-part/6618018/?ref=snap
U2: library part CMP-016-00004-3, "I2C Real-Time Clock, 5 V, 0 to 70 degC, 8-Pin DIP, RoHS, Tube", Case/Package=DIP, Manufacturer=Maxim, Max Operating Temperature=70°C, Max Supply Voltage=5.5V, Min Operating Temperature=0°C, Min Supply Voltage=4.5V, Nominal Supply Voltage=5V, Package Description="8-Pin Plastic Dual-In-Line, Narrow (0.3in) (P8-1), Body 9.375 x 6.985 mm, Pitch 2.54 mm", Package Quantity=50, Package Reference=P8-1, Package Version="Rev. E, 04/2011", Datasheet URL=https://datasheet.ciiva.com/20167/82-0567-20167410.pdf, Datasheet Version="Rev. 100208, 10/2008", Interface=Serial, Manufacturer URL=http://www.maximintegrated.com/, Mounting Technology=TH, Package URL=http://pdfserv.maximintegrated.com/package_dwgs/21-0043.PDF, Packaging=Rail/Tube, Pins=8, RoHS Compliant=True
U3: "Development board STM32F103C8T6", Supplier Part Number 1=59M2182, Supplier 1=Newark
UN1: "Positive Voltage Regulator"
Y1: library part XTAL, "Crystal For all Crystal 2pin"

## Nets (pads, with @x,y where several pads share a name; then routed paths per layer and width w, separated by ;. In a path a pad name is that pad's centre, name@x,y a point inside that pad or via, vN(x,y) a via of type N, cw(c..) or ccw(c..) an arc to the next point about the centre after c; other vN are vias at no path point)
3V3: J1.1 P4.2 R1.1 R5.1 R6.1 U1.1 U3.20 U3.38 | length 5083.3
  Top Layer w20: U3.38 1755,703 1810,648 3360,648 3455,553 U3.20
  Bottom Layer w30: U3.38 1755,1186 ; J1.1 1757,1188 1755,1186 ; R5.1 1920,1447.33 ; R6.1 2016.5,1379 2006.5,1389 2006.5,1437.41 1996.58,1447.33 1920,1447.33 ; 1755,1186 1755,1375 1827.33,1447.33 1920,1447.33
  Bottom Layer w50: U3.20 3455,651 3589.51,785.51 3732.51,785.51 P4.2 ; U1.1 3540,1344.2 ; R1.1 3540,1344.2 ; P4.2@3735.63,788.63 3808.13,788.63 3855,835.5 3855,1134.34 3825.71,1163.63 3479.29,1163.63 3450,1192.92 3450,1314.91 3479.29,1344.2 3540,1344.2
5V: B*1.1 C2.2 J2.1 P3.2 R2.2 R3.2 R4.1 U2.8 U3.18 UN1.3 | length 6705.2
  Bottom Layer w50: C2.2 R4.1 ; UN1.3 R4.1 ; R3.2 1115,1313 ; R2.2 1120,1493 1115,1488 ; U2.8 1293.27,1281.27 1293.27,1237.67 1263.6,1208 1144.29,1208 1115,1237.29 1115,1313 ; J2.1 1820,1898 ; B*1.1 3110,1896.68 3108.68,1898 ; U3.18@3255,334.97 3255,238 3285,208 3528.89,208 P3.2@3738.89,418 ; P3.2@3743.52,418 3870,418 3995,543 3995,1568 3665,1898 3108.68,1898 ; R4.1 1110,1493 1115,1488 ; 1115,1313 1115,1488 ; 1115,1488 1115,1718 1295,1898 1820,1898 ; 1820,1898 3108.68,1898
BUZZER: R8.1 U3.26 | length 303.6
  Bottom Layer w20: R8.1 2910,1078 2955,1033 U3.26
CLK: P4.5 U3.10 | length 1846.6
  Bottom Layer w20: U3.10 2455,658 2660,863 3488,863 3545,920 3545,1037 3596,1088 P4.5
DHT_PIN: R1.2 U1.2 U3.25 | length 1380.9
  Bottom Layer w20: U3.25 3053.42,939.58 3053.42,1036.42 3090,1073 3340,1073 3385,1118 3385,1468 3465,1548 3590,1548 3630,1508 R1.2 3635,1443 3635,1245.4 U1.2
DT: P4.4 U3.11 | length 1676.5
  Bottom Layer w20: U3.11 2555,658 2725,828 3506,828 3580,902 3580,970 3598,988 P4.4
GND: C1.1 C2.1 D2.2 J2.10 P1.1 P2.2 P3.1 P4.1 Q1.1 R7.1 U1.4 U2.4 U3.19 U3.39 U3.40 UN1.2 | length 11958.1
  Top Layer w20: U3.39 1655,698 1740,613 3245,613 3355,503 U3.19
  Bottom Layer w20: U2.4 1675,1583 1711,1547 1711,1503 ; U3.39 1655,1143 1711,1199 1711,1503 ; R7.1 2720,1503 ; J2.10 2720,1613 ; Q1.1 3300,1538 3225,1613 2720,1613 ; U3.19 3360.74,332.26 3360.74,277.26 3380,258 3505,258 3545,298 3545,518 3630,603 3735,603 ; 1711,1503 2720,1503 ; 2720,1503 2720,1613
  Bottom Layer w50: P2.2 307,678 ; P1.1@520,1733 P1.1 505,1806.24 ; D2.2 885,1127.29 855.71,1098 785,1098 ; C2.1 C1.1 785,1098 ; UN1.2 885,1806.24 505,1806.24 ; U3.40 U3.39 1655,618 1610,573 336.29,573 307,602.29 307,678 ; P4.1 3735,603 3735,520.56 P3.1@3737.56,518 ; 3737.5,603 3820,603 3925,708 3925,1208.24 3895.71,1237.53 3842.87,1237.53 U1.4 ; 307,678 307,1098 ; 307,1098 307,1745 368.24,1806.24 505,1806.24 ; 307,1098 785,1098
I2C1_SCL: P3.4 U3.14 | length 1069.1
  Bottom Layer w20: U3.14 2855.36,337.64 2855.36,242.64 2975,123 3645,123 P3.4
I2C1_SDA: P3.3 U3.15 | length 987.2
  Bottom Layer w20: U3.15@2954.82,337.82 2954.82,233.18 3030,158 3580,158 P3.3
I2C2_SCL_3V3: J1.3 R6.2 U3.35 | length 365.9
  Bottom Layer w20: R6.2 2019.5,1288.5 2019.5,1188.5 J1.3 2020,1088 2055,1053 U3.35
I2C2_SCL_5V: J2.3 R3.1 U2.6 | length 1032
  Bottom Layer w20: R3.1 1202.5,1403 1275.03,1475.53 1287.53,1475.53 U2.6 1349,1483 1508,1642 1681,1642 1748.39,1574.61 1971.61,1574.61 2020,1623 J2.3
I2C2_SDA_3V3: J1.2 R5.2 U3.36 | length 364.5
  Bottom Layer w20: R5.2 J1.2 1920,1083 1955,1048 U3.36
I2C2_SDA_5V: J2.2 R2.1 U2.5 | length 850.3
  Bottom Layer w20: R2.1 U2.5 1391,1679 1694,1679 1763.39,1609.61 1891.61,1609.61 1920,1638 J2.2
NetB*1_2: B*1.2 Q1.2 | length 342.3
  Bottom Layer w20: B*1.2 3200,1438 Q1.2
NetD1_1: D1.1 F1.2 | length 248.8
  Bottom Layer w50: D1.1 414.21,1233 546.02,1364.81 557.17,1364.81 562.68,1370.32 F1.2
NetD2_1: D2.1 R4.2 | length 150
  Bottom Layer w50: D2.1 R4.2
NetF1_1: F1.1 P1.2 | length 251
  Bottom Layer w50: F1.1 397.32,1522.32 449.46,1574.46 499.26,1574.46 P1.2
NetJ1_10: J1.10 R7.2 | length 155
  Bottom Layer w20: J1.10 R7.2
NetP2_1: P2.1 U2.3 | length 1010.5
  Bottom Layer w30: P2.1 1290,853 1665,1228 1665,1449.18 1632.92,1481.27 1596.73,1481.27 U2.3
NetQ1_3: Q1.3 R8.2 | length 100
  Bottom Layer w20: R8.2 Q1.3
NetU2_1: U2.1 Y1.2 | length 100
  Bottom Layer w20: Y1.2 U2.1
NetU2_2: U2.2 Y1.1 | length 247.3
  Bottom Layer w20: Y1.1 1395,1293 1485,1383 U2.2
SW: P4.3 U3.12 | length 1498.2
  Bottom Layer w20: U3.12 2655,663 2777,785 3515,785 3618,888 P4.3
Vin: C1.2 D1.2 UN1.1 | length 572.5
  Bottom Layer w50: D1.2 587.44,1233 655,1300.56 655,1448 700,1493 C1.2 UN1.1
pads on no net: H1.1 H2.1 H3.1 H4.1 J1.4 J1.5 J1.6 J1.7 J1.8 J1.9 J2.4 J2.5 J2.6 J2.7 J2.8 J2.9 LOGO1.1 U1.3 U2.7 U3.1 U3.2 U3.3 U3.4 U3.5 U3.6 U3.7 U3.8 U3.9 U3.13 U3.16 U3.17 U3.21 U3.22 U3.23 U3.24 U3.27 U3.28 U3.29 U3.30 U3.31 U3.32 U3.33 U3.34 U3.37

## Polygon pours and split planes (outlines as drawn)
GND on Bottom Layer "GND_L02_P000" (solid, remove dead copper, pour order 0): 0,0 0,2165.35 4330.71,2165.35 4330.71,0

## Keep-outs
Keep-Out Layer:
  lines w20: 0,0 4330.71,0 4330.71,2165.35 0,2165.35 0,0

## Other copper
Bottom Layer:
  region: 881.18,437.72 878.19,437.72 878.19,416.79 875.2,416.79 875.2,398.85 872.21,398.85 872.21,377.92 869.22,377.92 869.22,356.99 866.23,356.99 866.23,339.05 863.24,339.05 863.24,318.12 860.25,318.12 860.25,300.18 857.26,300.18 857.26,291.21 854.27,291.21 854.27,288.22 851.28,288.22 851.28,276.26 854.27,276.26 854.27,273.27 902.11,273.27 902.11,276.26 905.1,276.26 905.1,285.23 902.11,285.23 902.11,288.22 899.12,288.22 899.12,291.21 896.13,291.21 896.13,303.17 899.12,303.17 899.12,312.14 926.03,312.14 926.03,291.21 923.04,291.21 923.04,288.22 920.05,288.22 920.05,285.23 917.06,285.23 917.06,276.26 920.05,276.26 920.05,273.27 949.95,273.27 949.95,276.26 952.94,276.26 952.94,285.23 949.95,285.23 949.95,288.22 946.96,288.22 946.96,294.2 943.97,294.2 943.97,306.16 940.98,306.16 940.98,327.09 937.99,327.09 937.99,345.03 935,345.03 935,362.97 932.01,362.97 932.01,380.91 929.02,380.91 929.02,398.85 926.03,398.85 926.03,419.78 923.04,419.78 923.04,425.76 926.03,425.76 926.03,428.75 929.02,428.75 929.02,434.73 932.01,434.73 932.01,440.71 929.02,440.71 929.02,443.7 881.18,443.7 hole: 911.08,395.86 914.07,395.86 914.07,380.91 914.07,377.92 914.07,374.93 917.06,374.93 917.06,356.99 920.05,356.99 920.05,336.06 923.04,336.06 923.04,324.1 902.11,324.1 902.11,345.03 905.1,345.03 905.1,365.96 908.09,365.96 908.09,389.88 911.08,389.88
  region: 1066.56,291.21 1066.56,288.22 1054.6,288.22 1054.6,291.21 1051.61,291.21 1051.61,300.18 1048.62,300.18 1048.62,309.15 1045.63,309.15 1045.63,312.14 1042.64,312.14 1042.64,315.13 1033.67,315.13 1033.67,312.14 1030.68,312.14 1030.68,303.17 1033.67,303.17 1033.67,282.24 1036.66,282.24 1036.66,276.26 1039.65,276.26 1039.65,273.27 1111.41,273.27 1111.41,276.26 1114.4,276.26 1114.4,285.23 1111.41,285.23 1111.41,288.22 1108.42,288.22 1108.42,291.21 1105.43,291.21 1105.43,428.75 1111.41,428.75 1111.41,434.73 1114.4,434.73 1114.4,440.71 1111.41,440.71 1111.41,443.7 1057.59,443.7 1057.59,428.75 1063.57,428.75 1063.57,425.76 1066.56,425.76 1066.56,294.2
  region: 156 vertices and 0 holes, not listed, extent 369.89,273.27 444.64,446.69
  region: 1248.95,440.71 1242.97,440.71 1242.97,437.72 1236.99,437.72 1236.99,434.73 1234,434.73 1234,431.74 1231.01,431.74 1231.01,428.75 1228.02,428.75 1228.02,425.76 1225.03,425.76 1225.03,419.78 1222.04,419.78 1222.04,413.8 1219.05,413.8 1219.05,404.83 1216.06,404.83 1216.06,392.87 1213.07,392.87 1213.07,327.09 1216.06,327.09 1216.06,315.13 1219.05,315.13 1219.05,306.16 1222.04,306.16 1222.04,300.18 1225.03,300.18 1225.03,294.2 1228.02,294.2 1228.02,291.21 1231.01,291.21 1231.01,288.22 1234,288.22 1234,285.23 1236.99,285.23 1236.99,282.24 1239.98,282.24 1239.98,279.25 1245.96,279.25 1245.96,276.26 1257.92,276.26 1257.92,273.27 1317.72,273.27 1317.72,276.26 1320.71,276.26 1320.71,288.22 1317.72,288.22 1317.72,291.21 1314.73,291.21 1314.73,294.2 1311.74,294.2 1311.74,425.76 1314.73,425.76 1314.73,428.75 1317.72,428.75 1317.72,431.74 1320.71,431.74 1320.71,443.7 1248.95,443.7 hole: 1263.9,431.74 1272.87,431.74 1272.87,297.19 1272.87,294.2 1272.87,285.23 1263.9,285.23 1263.9,288.22 1260.91,288.22 1260.91,291.21 1257.92,291.21 1257.92,425.76 1260.91,425.76 1260.91,428.75 1263.9,428.75
  region: 842.31,342.04 842.31,395.86 839.32,395.86 839.32,407.82 836.33,407.82 836.33,413.8 833.34,413.8 833.34,422.77 830.35,422.77 830.35,428.75 827.36,428.75 827.36,431.74 824.37,431.74 824.37,434.73 821.38,434.73 821.38,437.72 818.39,437.72 818.39,440.71 815.4,440.71 815.4,443.7 809.42,443.7 809.42,446.69 791.48,446.69 791.48,443.7 785.5,443.7 785.5,440.71 782.51,440.71 782.51,443.7 779.52,443.7 779.52,446.69 767.56,446.69 767.56,437.72 764.57,437.72 764.57,395.86 776.53,395.86 776.53,398.85 779.52,398.85 779.52,410.81 782.51,410.81 782.51,422.77 785.5,422.77 785.5,428.75 788.49,428.75 788.49,431.74 794.47,431.74 794.47,428.75 797.46,428.75 797.46,288.22 794.47,288.22 794.47,285.23 788.49,285.23 788.49,288.22 785.5,288.22 785.5,294.2 782.51,294.2 782.51,309.15 779.52,309.15 779.52,315.13 764.57,315.13 764.57,294.2 767.56,294.2 767.56,288.22 770.55,288.22 770.55,282.24 773.54,282.24 773.54,279.25 779.52,279.25 779.52,276.26 782.51,276.26 782.51,273.27 809.42,273.27 809.42,276.26 815.4,276.26 815.4,279.25 818.39,279.25 818.39,282.24 821.38,282.24 821.38,285.23 824.37,285.23 824.37,288.22 827.36,288.22 827.36,294.2 830.35,294.2 830.35,300.18 833.34,300.18 833.34,306.16 836.33,306.16 836.33,315.13 839.32,315.13 839.32,330.08 842.31,330.08 842.31,339.05
  region: 156 vertices and 0 holes, not listed, extent 450.62,273.27 525.37,446.69
  region: 576.2,443.7 567.23,443.7 567.23,440.71 564.24,440.71 564.24,437.72 558.26,437.72 558.26,434.73 555.27,434.73 555.27,428.75 552.28,428.75 552.28,425.76 549.29,425.76 549.29,419.78 546.3,419.78 546.3,413.8 543.31,413.8 543.31,407.82 540.32,407.82 540.32,398.85 537.33,398.85 537.33,383.9 534.34,383.9 534.34,354 534.34,351.01 534.34,333.07 537.33,333.07 537.33,321.11 540.32,321.11 540.32,312.14 543.31,312.14 543.31,303.17 546.3,303.17 546.3,297.19 549.29,297.19 549.29,294.2 552.28,294.2 552.28,288.22 555.27,288.22 555.27,285.23 558.26,285.23 558.26,282.24 561.25,282.24 561.25,279.25 567.23,279.25 567.23,276.26 573.21,276.26 573.21,273.27 600.12,273.27 600.12,276.26 609.09,276.26 609.09,279.25 612.08,279.25 612.08,282.24 615.07,282.24 615.07,285.23 618.06,285.23 618.06,288.22 621.05,288.22 621.05,291.21 624.04,291.21 624.04,297.19 627.03,297.19 627.03,303.17 630.02,303.17 630.02,309.15 633.01,309.15 633.01,321.11 636,321.11 636,333.07 638.99,333.07 638.99,383.9 636,383.9 636,398.85 633.01,398.85 633.01,407.82 630.02,407.82 630.02,416.79 627.03,416.79 627.03,422.77 624.04,422.77 624.04,425.76 621.05,425.76 621.05,428.75 618.06,428.75 618.06,434.73 615.07,434.73 615.07,437.72 609.09,437.72 609.09,440.71 606.1,440.71 606.1,443.7 597.13,443.7 597.13,446.69 576.2,446.69 hole: 582.18,434.73 591.15,434.73 591.15,431.74 594.14,431.74 594.14,324.1 594.14,321.11 594.14,288.22 591.15,288.22 591.15,285.23 582.18,285.23 582.18,288.22 579.19,288.22 579.19,431.74 582.18,431.74
  region: 955.93,443.7 949.95,443.7 949.95,416.79 946.96,416.79 946.96,407.82 949.95,407.82 949.95,404.83 961.91,404.83 961.91,410.81 964.9,410.81 964.9,425.76 967.89,425.76 967.89,431.74 973.87,431.74 973.87,291.21 970.88,291.21 970.88,288.22 967.89,288.22 967.89,285.23 964.9,285.23 964.9,279.25 967.89,279.25 967.89,276.26 970.88,276.26 970.88,273.27 1018.72,273.27 1018.72,276.26 1021.71,276.26 1021.71,288.22 1018.72,288.22 1018.72,291.21 1015.73,291.21 1015.73,294.2 1012.74,294.2 1012.74,431.74 1021.71,431.74 1021.71,425.76 1024.7,425.76 1024.7,407.82 1027.69,407.82 1027.69,404.83 1042.64,404.83 1042.64,428.75 1039.65,428.75 1039.65,443.7 958.92,443.7
  region: 328.03,491.54 322.05,491.54 322.05,488.55 316.07,488.55 316.07,485.56 313.08,485.56 313.08,479.58 310.09,479.58 310.09,473.6 307.1,473.6 307.1,222.44 310.09,222.44 310.09,216.46 313.08,216.46 313.08,210.48 316.07,210.48 316.07,207.49 322.05,207.49 322.05,204.5 328.03,204.5 328.03,201.51 1359.58,201.51 1359.58,204.5 1365.56,204.5 1365.56,207.49 1371.54,207.49 1371.54,210.48 1374.53,210.48 1374.53,216.46 1377.52,216.46 1377.52,222.44 1380.51,222.44 1380.51,473.6 1377.52,473.6 1377.52,479.58 1374.53,479.58 1374.53,485.56 1371.54,485.56 1371.54,488.55 1365.56,488.55 1365.56,491.54 1359.58,491.54 1359.58,494.53 328.03,494.53 hole: 331.02,476.59 1356.59,476.59 1356.59,473.6 1359.58,473.6 1359.58,470.61 1362.57,470.61 1362.57,225.43 1359.58,225.43 1359.58,222.44 1356.59,222.44 1356.59,219.45 331.02,219.45 331.02,222.44 328.03,222.44 328.03,225.43 325.04,225.43 325.04,470.61 328.03,470.61 328.03,473.6 331.02,473.6
  region: 680.85,440.71 674.87,440.71 674.87,437.72 668.89,437.72 668.89,434.73 665.9,434.73 665.9,431.74 662.91,431.74 662.91,428.75 659.92,428.75 659.92,425.76 656.93,425.76 656.93,419.78 653.94,419.78 653.94,410.81 650.95,410.81 650.95,395.86 650.95,392.87 650.95,383.9 653.94,383.9 653.94,374.93 656.93,374.93 656.93,371.94 659.92,371.94 659.92,368.95 662.91,368.95 662.91,365.96 665.9,365.96 665.9,362.97 668.89,362.97 668.89,359.98 674.87,359.98 674.87,356.99 680.85,356.99 680.85,354 671.88,354 671.88,351.01 668.89,351.01 668.89,348.02 662.91,348.02 662.91,345.03 659.92,345.03 659.92,339.05 656.93,339.05 656.93,333.07 653.94,333.07 653.94,291.21 650.95,291.21 650.95,288.22 647.96,288.22 647.96,276.26 650.95,276.26 650.95,273.27 683.84,273.27 683.84,276.26 686.83,276.26 686.83,279.25 689.82,279.25 689.82,285.23 692.81,285.23 692.81,345.03 695.8,345.03 695.8,348.02 710.75,348.02 710.75,294.2 707.76,294.2 707.76,288.22 704.77,288.22 704.77,276.26 707.76,276.26 707.76,273.27 752.61,273.27 752.61,276.26 755.6,276.26 755.6,279.25 758.59,279.25 758.59,285.23 755.6,285.23 755.6,291.21 749.62,291.21 749.62,428.75 755.6,428.75 755.6,431.74 758.59,431.74 758.59,440.71 755.6,440.71 755.6,443.7 680.85,443.7 hole: 698.79,431.74 710.75,431.74 710.75,362.97 695.8,362.97 695.8,368.95 692.81,368.95 692.81,383.9 692.81,386.89 692.81,425.76 695.8,425.76 695.8,428.75 698.79,428.75
  region: 1156.26,300.18 1156.26,288.22 1144.3,288.22 1144.3,291.21 1141.31,291.21 1141.31,297.19 1138.32,297.19 1138.32,306.16 1135.33,306.16 1135.33,312.14 1132.34,312.14 1132.34,315.13 1120.38,315.13 1120.38,300.18 1123.37,300.18 1123.37,282.24 1126.36,282.24 1126.36,276.26 1129.35,276.26 1129.35,273.27 1201.11,273.27 1201.11,276.26 1204.1,276.26 1204.1,288.22 1198.12,288.22 1198.12,291.21 1195.13,291.21 1195.13,428.75 1201.11,428.75 1201.11,431.74 1204.1,431.74 1204.1,443.7 1129.35,443.7 1129.35,440.71 1126.36,440.71 1126.36,425.76 1123.37,425.76 1123.37,407.82 1135.33,407.82 1135.33,410.81 1138.32,410.81 1138.32,419.78 1141.31,419.78 1141.31,425.76 1144.3,425.76 1144.3,431.74 1156.26,431.74 1156.26,371.94 1144.3,371.94 1144.3,377.92 1141.31,377.92 1141.31,386.89 1138.32,386.89 1138.32,389.88 1132.34,389.88 1132.34,386.89 1129.35,386.89 1129.35,383.9 1126.36,383.9 1126.36,345.03 1129.35,345.03 1129.35,342.04 1141.31,342.04 1141.31,351.01 1144.3,351.01 1144.3,356.99 1147.29,356.99 1147.29,359.98 1156.26,359.98 1156.26,303.17

## Text inside footprints (layer, text, board x,y; h text height)
B*1: Top Overlay "+" at 3010,2028 h112.5 r270
J1: Top Overlay "1" at 1812.52,1254.93 h40; Top Overlay "10" at 2693.23,1254.93 h40
J2: Top Overlay "1" at 1812.52,1754.93 h40; Top Overlay "10" at 2693.23,1754.93 h40
LOGO1: Bottom Overlay "PIF" at 836.57,737.47 h37.5
P4: Top Overlay "5" at 3668.07,1073.04 h40 r90; Top Overlay "1" at 3668.07,683.28 h40 r90